# Altium PCB PCB.PcbDoc
Units mm, origin at the board's own origin, x right, y up, seen from the top; angles counter-clockwise.
Board outline 50 x 50 mm, 2 copper layers (Top Layer, Bottom Layer), stack 1.57 mm thick; 94 components, 44 nets, 247 pads, 64 vias.
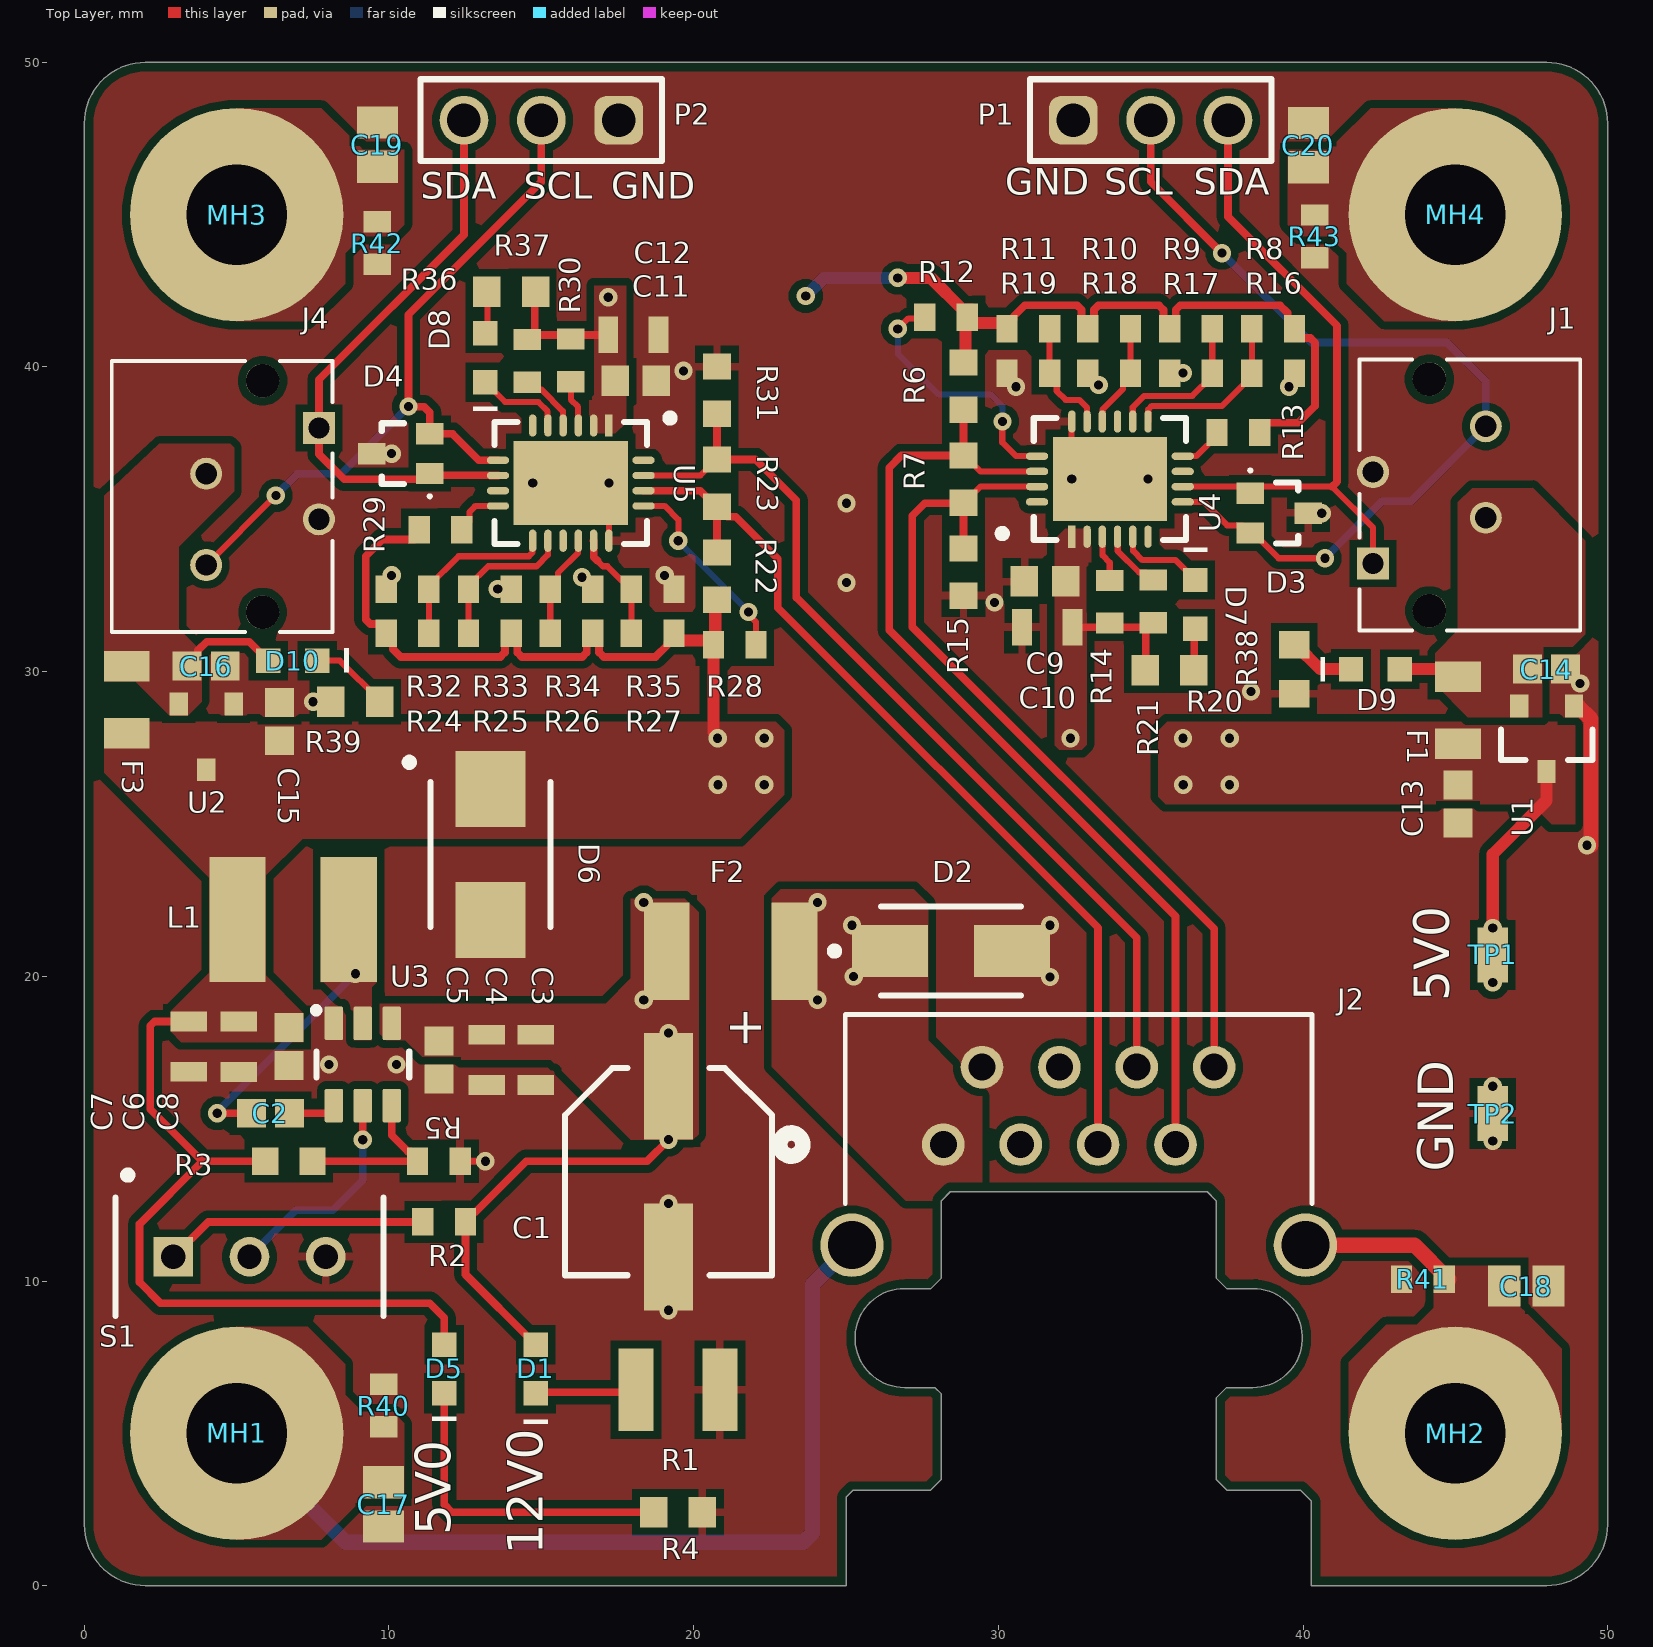
[diagram p0: Top Layer view]
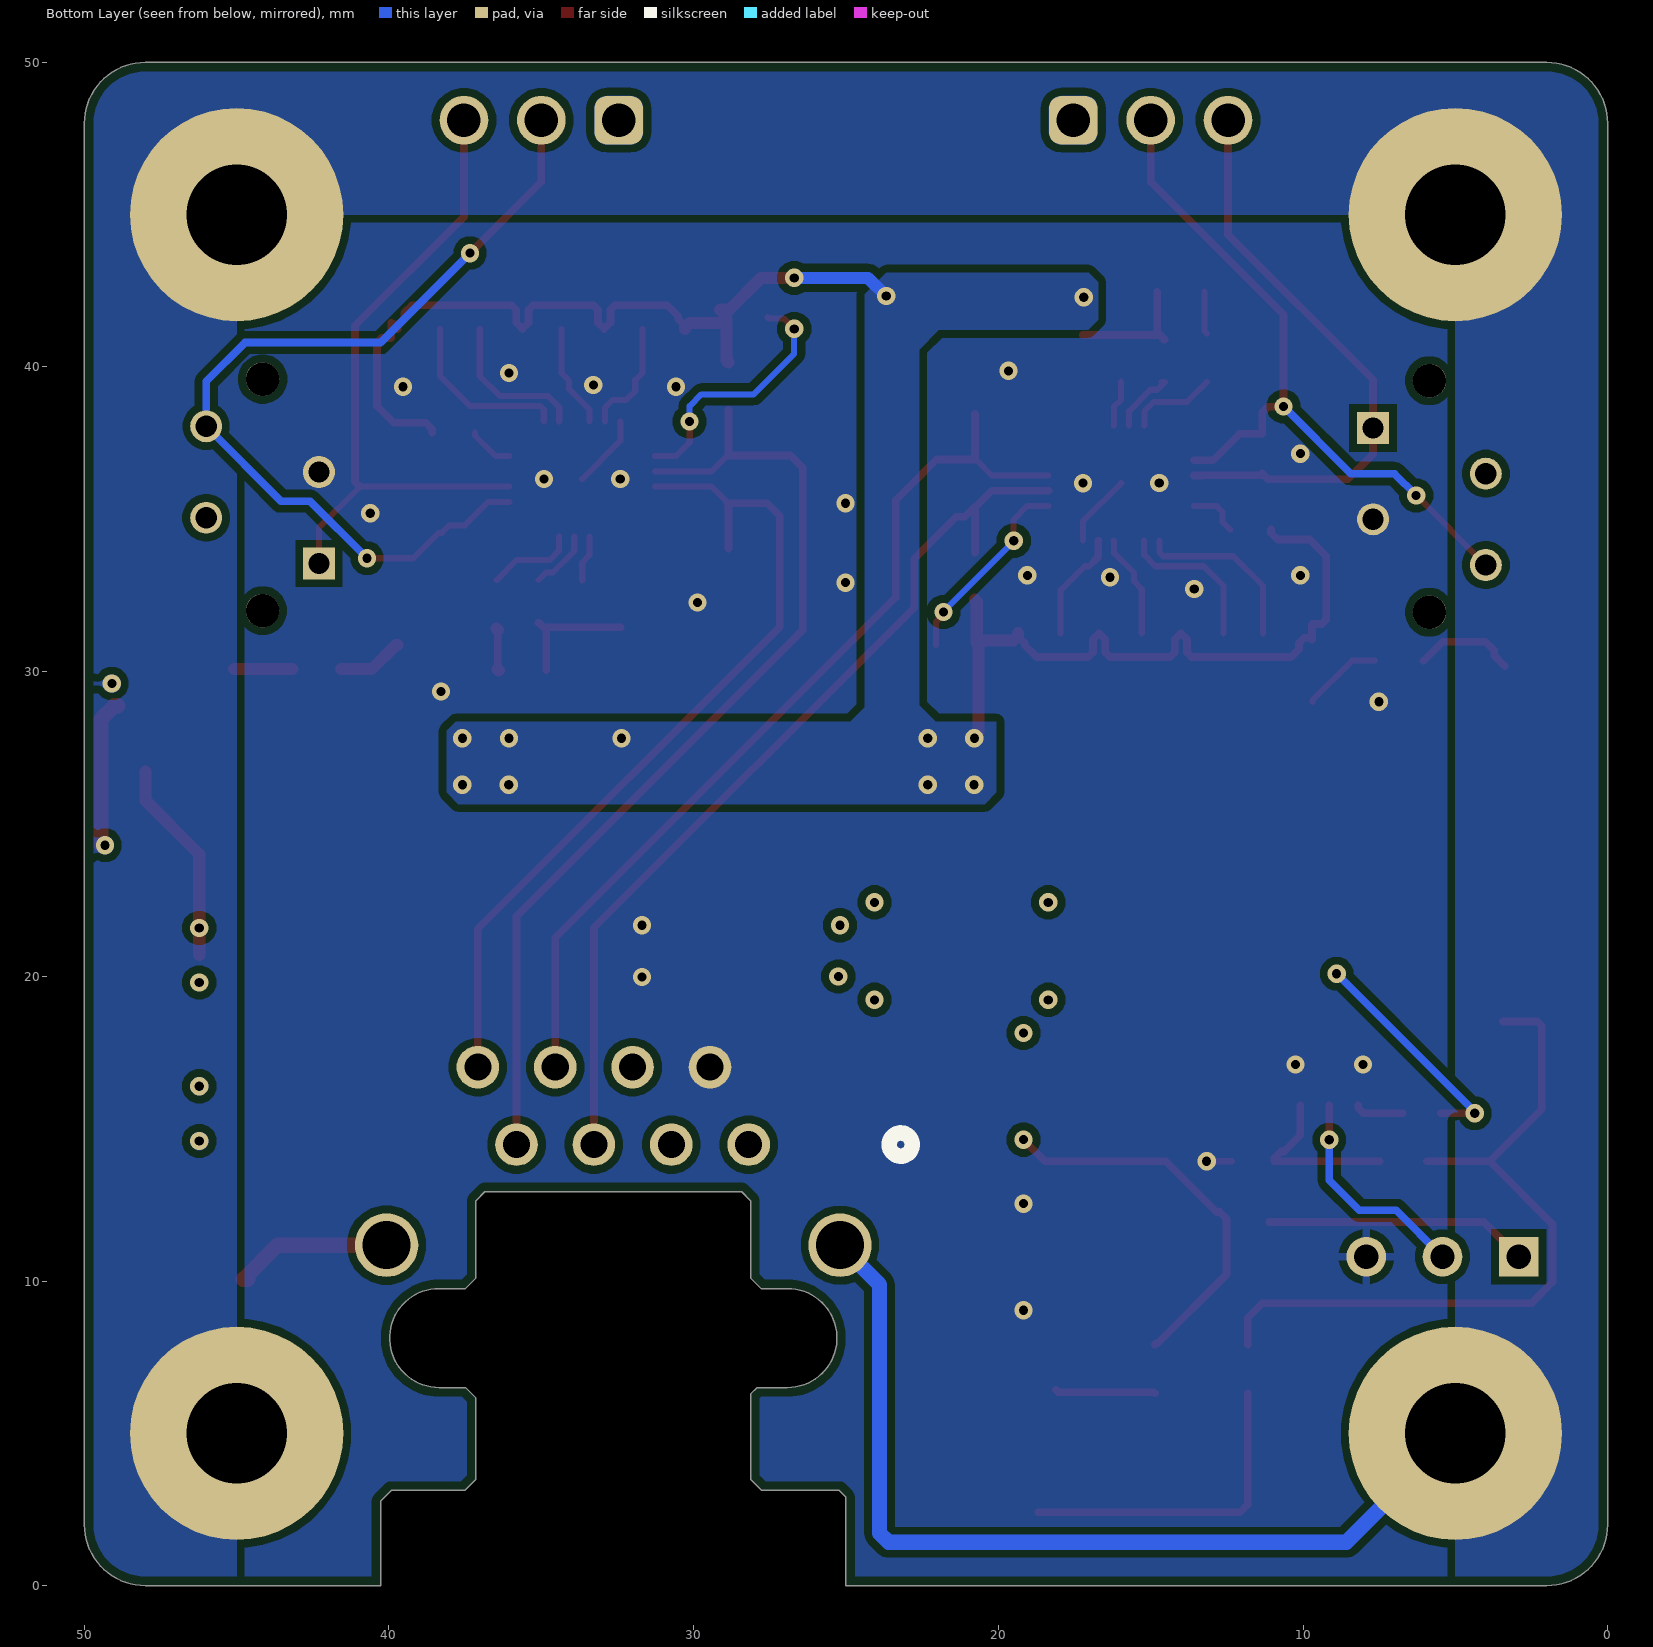
[diagram p1: Bottom Layer view, seen from below]
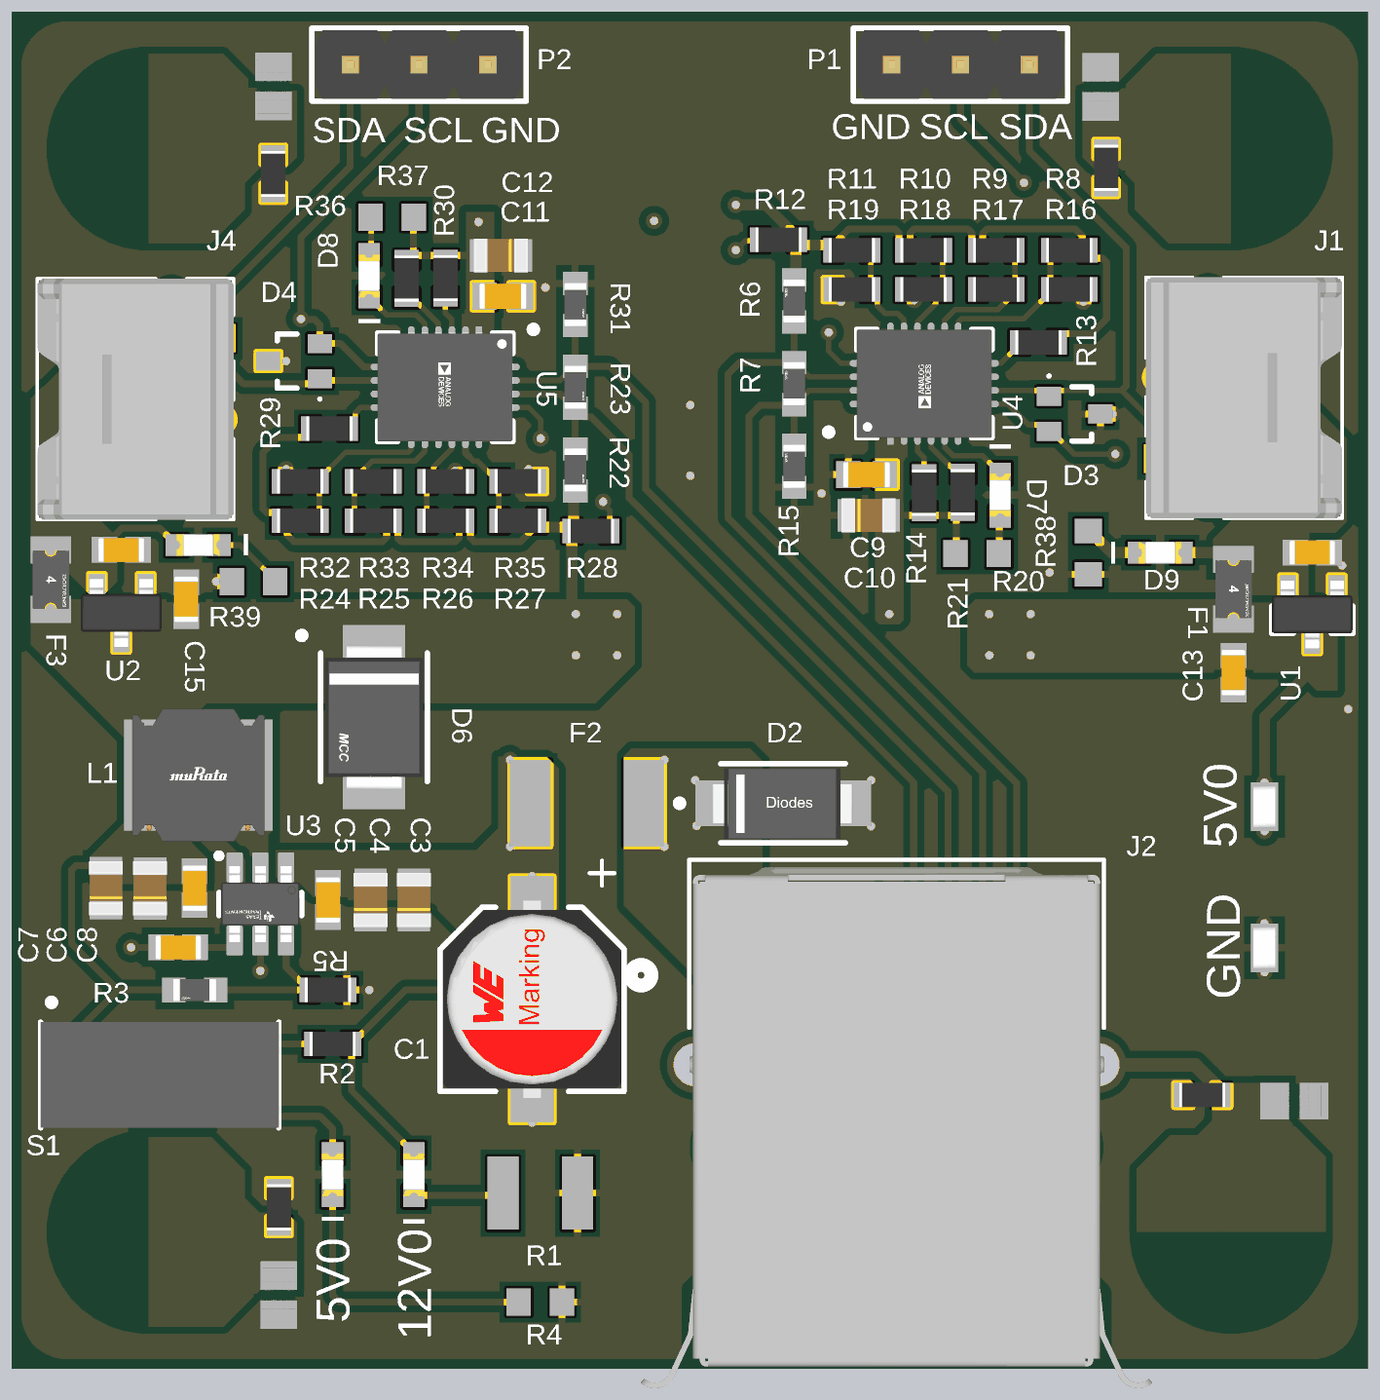
[diagram p2: 3D render of the assembled board from above, using the file's embedded part models]

## Layer stack, top to bottom
Top Solder: solder mask 0.01, Solder Resist, Dk 3.5
Top Layer: signal copper 0.035
Dielectric 1: dielectric 1.5, FR-4, Dk 4.8
Bottom Layer: signal copper 0.035
Bottom Solder: solder mask 0.01, Solder Resist, Dk 3.5

## Board outline
2,0 cw(c2,2) 0,2 0,48 cw(c2,48) 2,50 48,50 cw(c48,48) 50,48 50,2 cw(c48,2) 48,0 40.272,0 40.272,2.781 39.929,3.124 37.516,3.124 37.148,3.492 37.148,6.159 37.49,6.502 38.354,6.502 ccw(c38.354,8.128) 38.354,9.754 37.49,9.754 37.148,10.096 37.148,12.636 36.855,12.929 28.423,12.929 28.13,12.636 28.13,10.096 27.788,9.754 26.924,9.754 ccw(c26.924,8.128) 26.924,6.502 27.915,6.502 28.13,6.286 28.13,3.492 27.762,3.124 25.222,3.124 25.006,2.908 25.006,0

## Design rules (kind name [scope] priority, off if disabled: settings)
AcuteAngle [All] p1: minimum=6.00000000000000E+0001 checktracksonly=FALSE
AssemblyTestPointUsage [All] p1 off: valid=2
AssemblyTestpoint [All] p1 off: testpointundercomponent=TRUE minsize=1.016 maxsize=2.54 preferedsize=1.524 minholesize=0 maxholesize=1.016 preferedholesize=0.813 testpointgrid=0.025 usegrid=TRUE gridtolerance=0 allowsidetop=TRUE allowsidebottom=TRUE
BoardOutlineClearance [All] p1: gap=0.3 ignorepadtopadclearanceinfootprint=FALSE
Clearance [All] p1: gap=0.254 ignorepadtopadclearanceinfootprint=TRUE except(0: Arc-Hole Track-Hole SMDPad-Hole THPad-Hole Via-Hole Fill-Hole Poly-Hole Region-Hole Text-Hole; 0.127: Track-Track SMDPad-SMDPad; 0.2: Track-SMDPad; 0.33: Track-THPad)
FabricationTestPointUsage [All] p1: valid=2 allowmultiple=FALSE
HoleSize [All] p1: absolutevalues=TRUE maxlimit=10 minlimit=0.025 maxpercent=80.000 minpercent=20.000
MinimumSolderMaskSliver [All] p1: minsoldermaskwidth=0.1
NetAntennae [All] p1 off: netantennaetolerance=0
PolygonConnect Vias [IsVia] p1: connectstyle=Direct reliefconductorwidth=0.254 reliefentries=4 polygonreliefangle="90 Angle" airgapwidth=0.254
PolygonConnect Direct_PadClass [InPadClass('Direct')] p2: connectstyle=Direct reliefconductorwidth=0.254 reliefentries=4 polygonreliefangle="90 Angle" airgapwidth=0.254
PolygonConnect [All] p3: connectstyle=Relief reliefconductorwidth=0.254 reliefentries=4 polygonreliefangle="90 Angle" airgapwidth=0.254
RoutingVias [All] p1: holewidth=0.4 width=0.6 viastyle="Through Hole" minholewidth=0.3 minwidth=0.5 maxholewidth=6.3 maxwidth=10
SolderMaskExpansion [All] p1: expansion=0.102 istentingtop=FALSE
Width [All] p1: maxlimit=1 minlimit=0.127 preferedwidth=0.254
24 further rules are at their usual default settings.

## Classes and differential pairs
component class Main: C17 C18 C19 C20 MH1 MH2 MH3 MH4 R40 R41 R42 R43
pad class Direct: C1-1 C1-2 C2-1 C2-2 C3-1 C3-2 C4-1 C4-2 C5-1 C5-2 C6-1 C6-2 C7-1 C7-2 C8-1 C8-2 C9-2 C10-2 C11-1 C11-2 C12-1 C12-2 C13-1 C13-2 C14-1 C14-2 C15-1 C15-2 C16-1 C16-2 C17-1 C17-2 C18-1 C18-2 C19-1 C19-2 C20-1 C20-2 D2-1 D2-2 D4-1 D4-2 D4-3 D6-1 D6-2 F1-1 F1-2 F2-1 F2-2 F3-1 F3-2 J1-1 J1-2 J1-3 J2-1 J2-2 J2-3 J4-2 J4-3 L1-1 L1-2 MH1-1 MH2-1 MH3-1 MH4-1 P1-1 P2-1 R19-1 R19-2 R35-1 R35-2 R40-1 R40-2 R41-1 R41-2 R42-1 R42-2 R43-1 R43-2 U1-1 U1-2 U1-3 U2-1 U2-2 U2-3 U3-1 U3-2 U3-3 U3-4 U3-5 U3-6 U4-1 U4-2 U5-1 U5-2
component class Power: C2 C3 C4 C5 C6 C7 C8 D5 D6 L1 R2 R3 R4 R5 S1 U3
component class "I2C extender 1": C11 C12 D8 R22 R23 R24 R25 R26 R27 R28 R29 R30 R31 R32 R33 R34 R35 R36 R37 U5
component class "I2C extender 0": C9 C10 D7 R6 R7 R8 R9 R10 R11 R12 R13 R14 R15 R16 R17 R18 R19 R20 R21 U4
component class Connectors: C1 C13 C14 C15 C16 D1 D2 D3 D4 D9 D10 F1 F2 F3 J1 J2 J4 P1 P2 R1 R38 R39 TP1 TP2 U1 U2

## Components (designator, comment, footprint, x,y, rotation, side; value= is the part's Value field where it differs from the comment)
C1 "875105544003" WCAP-PSLP_D6.3H5.8 19.177,13.589 r90 top value=22µF
C2 "Capacitor 100 nF +/-10% 50 V 0603" CAPC1608X90X40NL10T20 6.108,15.507 r0 top value=100nF
C3 "CAP CER 10UF 16V X5R 0805" "CAP CER 10UF 16V X5R 0805-Footprint-1" 14.813,17.257 r90 top value=10µF
C4 "CAP CER 10UF 16V X5R 0805" "CAP CER 10UF 16V X5R 0805-Footprint-1" 13.21,17.257 r90 top value=10µF
C5 "Capacitor 100 nF +/-10% 50 V 0603" CAPC1608X90X40NL10T20 11.638,17.257 r90 top value=100nF
C6 "CL21A226MOQNNNE" CL21A226MOQNNNE-Footprint-1 5.066,17.687 r90 top value=22µF
C7 "CL21A226MOQNNNE" CL21A226MOQNNNE-Footprint-1 3.435,17.695 r90 top value=22µF
C8 "Capacitor 100 nF +/-10% 50 V 0603" CAPC1608X90X40NL10T20 6.713,17.694 r90 top value=100nF
C9 "Capacitor 1uF +/- 10% 16V 0603" CAPC1608X90X35NL15T15 31.531,32.961 r0 top value=1µF
C10 "CL21A475KOFNNNE" CL21A475KOFNNNE-Footprint-1 31.605,31.456 r0 top value=4.7µF
C11 "Capacitor 1uF +/- 10% 16V 0603" CAPC1608X90X35NL15T15 18.098,39.55 r180 top value=1µF
C12 "CL21A475KOFNNNE" CL21A475KOFNNNE-Footprint-1 18.024,41.055 r180 top value=4.7µF
C13 "Capacitor 100 nF +/-10% 50 V 0603" CAPC1608X90X40NL10T20 45.085,25.654 r90 top value=100nF
C14 "Capacitor 100 nF +/-10% 50 V 0603" CAPC1608X90X40NL10T20 47.996,30.083 r180 top value=100nF
C15 "Capacitor 100 nF +/-10% 50 V 0603" CAPC1608X90X40NL10T20 6.4,28.358 r270 top value=100nF
C16 "Capacitor 100 nF +/-10% 50 V 0603" CAPC1608X90X40NL10T20 4,30.183 r180 top value=100nF
C17 "CL21A225KBFNNNE" FP-CL21-IPC_C 9.821,2.667 r90 top value=2.2µF
C18 "CL21A225KBFNNNE" FP-CL21-IPC_C 47.332,9.834 r180 top value=2.2µF
C19 "CL21A225KBFNNNE" FP-CL21-IPC_C 9.621,47.3 r270 top value=2.2µF
C20 "CL21A225KBFNNNE" FP-CL21-IPC_C 40.179,47.281 r270 top value=2.2µF
D1 "150060RS75000" WL-SMCW_0603_150060xx75000 14.812,7.112 r90 top
D2 "SMAJ5.0A-13-F" FP-SMA-MFG 28.448,20.828 r0 top
D3 "DF3A6.8FUT1G" ONSC-SC-70-3-419-04_V 39.219,35.204 r0 top
D4 "DF3A6.8FUT1G" ONSC-SC-70-3-419-04_V 10.388,37.155 r180 top
D5 "150060BS75000" WL-SMCW_0603_150060xx75000 11.811,7.112 r90 top
D6 "SMBJ5340B-TP" FP-DO-214AA-MFG 13.335,24.003 r270 top
D7 "150060YS75000" WL-SMCW_0603_150060xx75000 36.469,32.207 r270 top
D8 "150060YS75000" WL-SMCW_0603_150060xx75000 13.16,40.304 r90 top
D9 "150060BS75000" WL-SMCW_0603_150060xx75000 42.374,30.083 r0 top
D10 "150060BS75000" WL-SMCW_0603_150060xx75000 6.842,30.36 r180 top
F1 "MF-PSMF050X-2" FP-MF-PSMF-MFG 45.085,28.729 r270 top
F2 "MF-MSMF075-2" BOUR-MF-MSMF050-2_V 21.212,20.828 r180 top
F3 "MF-PSMF050X-2" FP-MF-PSMF-MFG 1.397,29.083 r270 top
J1 "5031750400" 5031750400-Footprint-1 42.3,33.552 r90 top
J2 "RJULE4218201" RJULE4218201-Footprint-1 28.194,14.478 r0 top locked
J4 "5031750400" 5031750400-Footprint-1 7.7,38 r270 top
L1 "LQH5BPN4R7N38L" FP-LQH5BPN_38-MFG 6.853,21.863 r0 top
MH1 "PTH-M3D7X7" PTH-M2D5X5#1 100.457,5.334 r0 top
MH2 "PTH-M3D7X7" PTH-M2D5X5#2 108.839,5.334 r0 top
MH3 "PTH-M3D7X7" PTH-M2D5X5#3 117.348,5.334 r0 top
MH4 "PTH-M3D7X7" PTH-M2D5X5#4 125.857,5.334 r0 top
P1 "61300311121" 61300311121 35,48.1 r0 top
P2 "61300311121" 61300311121 15,48.1 r180 top
R1 "RC1210JR-07510RL" RESC3126X60X50NL10T20 19.484,6.431 r180 top value=510
R2 "Resistor 10k +/-1% 0603 100 mW" RESC1608X55X25NL10T15 11.811,11.938 r0 top value=10k
R3 "RC0603FR-0756K2L" RC0603JR-0730KL-Footprint-1 6.713,13.931 r180 top value=56.2k
R4 "RC0603JR-07180RL" RESC0603(1608)_N 19.484,2.413 r180 top value=180
R5 "Resistor 10k +/-1% 0603 100 mW" RESC1608X55X25NL10T15 11.638,13.931 r180 top value=10k
R6 "RC0603FR-07620RL" RC0603JR-0720KL-Footprint-1 28.859,39.374 r90 top value=620
R7 "RC0603FR-07110RL" RC0603JR-0720KL-Footprint-1 28.859,36.322 r90 top value=110
R8 "Resistor 10k +/-1% 0603 100 mW" RESC1608X55X25NL10T15 39.019,41.251 r0 top value=10k
R9 "Resistor 10k +/-1% 0603 100 mW" RESC1608X55X25NL10T15 36.322,41.251 r180 top value=10k
R10 "Resistor 10k +/-1% 0603 100 mW" RESC1608X55X25NL10T15 33.637,41.251 r180 top value=10k
R11 "Resistor 10k +/-1% 0603 100 mW" RESC1608X55X25NL10T15 30.985,41.251 r180 top value=10k
R12 "Resistor 10k +/-1% 0603 100 mW" RESC1608X55X25NL10T15 28.28,41.632 r180 top value=10k
R13 "Resistor 10k +/-1% 0603 100 mW" RESC1608X55X25NL10T15 37.876,37.849 r180 top value=10k
R14 "Resistor 10k +/-1% 0603 100 mW" RESC1608X55X25NL10T15 33.657,32.295 r90 top value=10k
R15 "RC0603FR-07620RL" RC0603JR-0720KL-Footprint-1 28.859,33.27 r90 top value=620
R16 "Resistor 10k +/-1% 0603 100 mW" RESC1608X55X25NL10T15 39.019,39.8 r180 top value=10k
R17 "Resistor 10k +/-1% 0603 100 mW" RESC1608X55X25NL10T15 36.322,39.8 r0 top value=10k
R18 "Resistor 10k +/-1% 0603 100 mW" RESC1608X55X25NL10T15 33.637,39.8 r0 top value=10k
R19 "Resistor 10k +/-1% 0603 100 mW" RESC1608X55X25NL10T15 30.985,39.8 r0 top value=10k
R20 "RC0603JR-07180RL" RESC0603(1608)_N 35.619,30.042 r180 top value=180
R21 "Resistor 10k +/-1% 0603 100 mW" RESC1608X55X25NL10T15 35.09,32.308 r90 top value=10k
R22 "RC0603FR-07620RL" RC0603JR-0720KL-Footprint-1 20.77,33.137 r270 top value=620
R23 "RC0603FR-07110RL" RC0603JR-0720KL-Footprint-1 20.77,36.189 r270 top value=110
R24 "Resistor 10k +/-1% 0603 100 mW" RESC1608X55X25NL10T15 10.61,31.26 r180 top value=10k
R25 "Resistor 10k +/-1% 0603 100 mW" RESC1608X55X25NL10T15 13.308,31.26 r0 top value=10k
R26 "Resistor 10k +/-1% 0603 100 mW" RESC1608X55X25NL10T15 15.993,31.26 r0 top value=10k
R27 "Resistor 10k +/-1% 0603 100 mW" RESC1608X55X25NL10T15 18.655,31.26 r0 top value=10k
R28 "Resistor 10k +/-1% 0603 100 mW" RESC1608X55X25NL10T15 21.349,30.879 r0 top value=10k
R29 "Resistor 10k +/-1% 0603 100 mW" RESC1608X55X25NL10T15 11.688,34.662 r0 top value=10k
R30 "Resistor 10k +/-1% 0603 100 mW" RESC1608X55X25NL10T15 15.972,40.217 r270 top value=10k
R31 "RC0603FR-07620RL" RC0603JR-0720KL-Footprint-1 20.77,39.241 r270 top value=620
R32 "Resistor 10k +/-1% 0603 100 mW" RESC1608X55X25NL10T15 10.61,32.711 r0 top value=10k
R33 "Resistor 10k +/-1% 0603 100 mW" RESC1608X55X25NL10T15 13.308,32.711 r180 top value=10k
R34 "Resistor 10k +/-1% 0603 100 mW" RESC1608X55X25NL10T15 15.993,32.711 r180 top value=10k
R35 "Resistor 10k +/-1% 0603 100 mW" RESC1608X55X25NL10T15 18.655,32.711 r180 top value=10k
R36 "RC0603JR-07180RL" RESC0603(1608)_N 14.01,42.469 r0 top value=180
R37 "Resistor 10k +/-1% 0603 100 mW" RESC1608X55X25NL10T15 14.539,40.203 r270 top value=10k
R38 "RC0603JR-07180RL" RESC0603(1608)_N 39.719,30.079 r90 top value=180
R39 "RC0603JR-07180RL" RESC0603(1608)_N 8.89,29.008 r0 top value=180
R40 "RC0603FR-07100KL" RESC1608X55X25NL10T15 9.821,5.912 r270 top value=100k
R41 "RC0603FR-07100KL" RESC1608X55X25NL10T15 43.932,10.054 r0 top value=100k
R42 "RC0603FR-07100KL" RESC1608X55X25NL10T15 9.621,44.069 r90 top value=100k
R43 "RC0603FR-07100KL" RESC1608X55X25NL10T15 40.379,44.288 r90 top value=100k
S1 "SLW-883935-2A-D" SLW-883935-2A-D-Footprint-1 5.421,10.795 r0 top
TP1 "RCUCTE" FP-S2761-46R-MFG 46.228,20.701 r90 top
TP2 "RCUCTE" FP-S2761-46R-MFG 46.228,15.494 r90 top
U1 "AP2337SA-7" SOT90P240X120-3L 47.996,27.803 r270 top
U2 "AP2337SA-7" SOT90P240X120-3L 4,27.858 r270 top
U3 "TPS563200DDCR" FP-DDC0006A-MFG 9.139,17.107 r270 top
U4 "LTC4331IUFD#TRPBF" FP-UFD-20-05-08-1711-IPC_C 33.663,36.322 r90 top
U5 "LTC4331IUFD#TRPBF" FP-UFD-20-05-08-1711-IPC_C 15.966,36.189 r270 top

## Footprints (in the part's own frame and the unit in brackets; to place one, negate y for a bottom-side part, rotate by r counter-clockwise, add the part's x,y. Pads: shape width x height; smd on the part's side, far side on the other; paste and mask are expansions set on the pad)
5031750400-Footprint-1 [mm]
  rect 1.05x1.05 / inner round 1.524 / far side rect 1.05x1.05 hole 0.7 paste-2539.97 mask+0.076: 1(0,0)
  round 1.05 / inner round 1.524 / far side round 1.05 hole 0.7 paste-2539.97 mask+0.076: 2(1.5,-3.7) 3(3,0) 4(4.5,-3.7)
  round 1.1 / inner round 1.524 / far side round 1.1 hole 1.1 unplated paste-2539.97 mask+0.076: 5(-1.55,-1.85) 6(6.05,-1.85)
  silkscreen extent -2.2,-6.8 6.7,0.45, body extent -2.2,-6.8 6.7,0.45, height 6.96
61300311121 [mm] "Pin Header, pitch 2.54 mm, THT, Vertical, single row, 3p"
  rrect50% 1.6x1.6 hole 1.1: 1(-2.54,0)
  round 1.6 hole 1.1: 2(0,0) 3(2.54,0)
  silkscreen extent -3.96,-1.35 3.96,1.35, body extent -3.81,-1.27 3.81,1.27, height 8.57
BOUR-MF-MSMF050-2_V [mm] "SMD, 2-Leads, Body 4.55x3.24mm"
  rect 1.5x3.2 smd: 1(-2.1,0) 2(2.1,0)
  body extent -2.28,-1.62 2.28,1.62, height 0.85
"CAP CER 10UF 16V X5R 0805-Footprint-1" [mm]
  rect 0.652x1.199 smd paste+0 mask+0: 1(-0.826,0) 2(0.826,0)
  body extent -1,-0.63 1,0.63, height 1.35
CAPC1608X90X35NL15T15 [mm] "Chip Capacitor, 2-Leads, Body 1.75x0.95mm, IPC Medium Density"
  rect 0.9x1 smd: 1(-0.675,0) 2(0.675,0)
  body extent -0.87,-0.48 0.87,0.48, height 0.9
CAPC1608X90X40NL10T20 [mm] "Chip Capacitor, 2-Leads, Body 1.70x0.90mm, IPC Medium Density"
  rect 0.95x0.95 smd mask+0: 1(-0.625,0) 2(0.625,0)
  body extent -0.85,-0.45 0.85,0.45, height 0.9
CL21A226MOQNNNE-Footprint-1 [mm] "CL21A226MOQNNNE-Footprint"
  rect 0.652x1.199 smd paste+0 mask+0: 1(-0.826,0) 2(0.826,0)
  body extent -1,-0.63 1,0.63, height 1.35
CL21A475KOFNNNE-Footprint-1 [mm] "CL21A475KOFNNNE-Footprint"
  rect 0.652x1.199 smd paste+0 mask+0: 1(-0.826,0) 2(0.826,0)
  body extent -1,-0.63 1,0.63, height 1.35
FP-CL21-IPC_C [mm]
  rect 1.055x1.356 smd paste+0 mask+0: 1(-0.726,0) 2(0.726,0)
  body extent -1,-0.63 1,0.63, height 1.45
FP-DDC0006A-MFG [mm]
  rrect17% 1.1x0.6 smd paste+0 mask+0: 1(-1.35,-0.95) 2(-1.35,0) 3(-1.35,0.95) 4(1.35,0.95) 5(1.35,0) 6(1.35,-0.95)
  silkscreen extent -1.88,-1.63 0.42,1.53, body extent -1.4,-1.45 1.4,1.45, height 1.1
FP-DO-214AA-MFG [mm]
  rect 2.5x2.3 smd paste+0 mask+0: 1(-2.15,0) 2(2.15,0)
  silkscreen extent -3.15,-2.79 2.37,1.97, body extent -2.66,-1.8 2.67,1.82, height 2.41
FP-LQH5BPN_38-MFG [mm]
  rect 1.85x4.1 smd paste+0 mask+0: 1(-1.825,0) 2(1.825,0)
  body extent -2.45,-2.45 2.45,2.45, height 4
FP-MF-PSMF-MFG [mm]
  rect 1x1.5 smd paste+0 mask+0: 1(-1.1,0) 2(1.1,0)
  body extent -1.07,-0.67 1.07,0.67, height 0.85
FP-S2761-46R-MFG [mm]
  rect 1.8x1 smd paste+0 mask+0: 1(0,0)
  body extent -0.8,-0.4 0.8,0.4, height 1.28
FP-SMA-MFG [mm]
  rect 2.5x1.7 smd paste+0 mask+0: 1(-2,0) 2(2,0)
  silkscreen extent -3.95,-1.46 2.3,1.46, body extent -2.63,-1.32 2.57,1.29, height 2.4
FP-UFD-20-05-08-1711-IPC_C [mm]
  rect 0.731x0.242 smd paste+0 mask+0: 1(-1.891,1.25)
  rrect100% 0.731x0.242 smd paste+0 mask+0: 2(-1.891,0.75) 3(-1.891,0.25) 4(-1.891,-0.25) 5(-1.891,-0.75) 6(-1.891,-1.25) 11(1.891,-1.25) 12(1.891,-0.75) 13(1.891,-0.25) 14(1.891,0.25) 15(1.891,0.75) 16(1.891,1.25)
  rrect100% 0.242x0.731 smd paste+0 mask+0: 7(-0.75,-2.391) 8(-0.25,-2.391) 9(0.25,-2.391) 10(0.75,-2.391) 17(0.75,2.391) 18(0.25,2.391) 19(-0.25,2.391) 20(-0.75,2.391)
  rect 2.75x3.75 smd paste-1000 mask+0: 21(0,0)
  silkscreen extent -2,-2.5 2,3.66, body extent -2,-2.5 2,2.5, height 0.8
ONSC-SC-70-3-419-04_V [mm] "SOT23, 3-Leads, Body 2x1.25mm, Pitch 0.65mm"
  rect 0.9x0.7 smd: 1(-0.95,0.65) 2(-0.95,-0.65) 3(0.95,0)
  silkscreen extent -1,-1 0.63,1.45, body extent -0.63,-1 0.63,1, height 1
PTH-M2D5X5#1 [mm]
  round 7 hole 3.3: 1(-95.457,-0.334)
PTH-M2D5X5#2 [mm]
  round 7 hole 3.3: 1(-63.839,-0.334)
PTH-M2D5X5#3 [mm]
  round 7 hole 3.3: 1(-112.348,39.666)
PTH-M2D5X5#4 [mm]
  round 7 hole 3.3: 1(-80.857,39.666)
RC0603JR-0720KL-Footprint-1 [mm] "RC0603JR-0720KL-Footprint"
  rect 0.859x0.912 smd paste+0 mask+0: 1(-0.777,0) 2(0.777,0)
  body extent -0.8,-0.4 0.8,0.4, height 0.55
RC0603JR-0730KL-Footprint-1 [mm]
  rect 0.859x0.912 smd paste+0 mask+0: 1(-0.777,0) 2(0.777,0)
  body extent -0.8,-0.4 0.8,0.4, height 0.55
RESC0603(1608)_N [mm] "Chip Resistor, Body 1.6x0.8mm, IPC Medium Density"
  rect 0.9x1 smd: 1(-0.8,0) 2(0.8,0)
  body extent -0.85,-0.47 0.85,0.47, height 0.6
RESC1608X55X25NL10T15 [mm] "Chip Resistor, 2-Leads, Body 1.70x0.90mm, IPC Medium Density"
  rect 0.7x0.9 smd: 1(-0.7,0) 2(0.7,0)
  body extent -0.85,-0.45 0.85,0.45, height 0.55
RESC3126X60X50NL10T20 [mm] "Chip Resistor, 2-Leads, Body 3.10x2.60mm, IPC Medium Density"
  rect 1.15x2.7 smd: 1(-1.375,0) 2(1.375,0)
  body extent -1.6,-1.35 1.6,1.35, height 0.6
RJULE4218201-Footprint-1 [mil]
  round 55 / inner round 60 / far side round 55 hole 35 paste-99999 mask+0: 1(0,0) 2(50,100) 3(100,0) 4(150,100) 5(200,0) 6(250,100) 7(300,0) 8(350,100)
  round 82 / inner round 60 / far side round 82 hole 62 paste-99999 mask-41: 9(-118,-130) 10(468,-130)
  silkscreen extent -211,-77 476,168, body extent -197,-600 547,157, height 366
SLW-883935-2A-D-Footprint-1 [mm]
  rect 1.3x1.3 hole 0.8: 1(-2.5,0)
  round 1.3 hole 0.8: 2(0,0) 3(2.5,0)
  silkscreen extent -4.4,-1.95 4.4,2.78, body extent -4.4,-1.95 4.4,1.95, height 6.2
SOT90P240X120-3L [mm] "SOT23, 3-Leads, Body 2.90x2.40mm, Pitch 0.90mm, IPC High Density"
  rect 0.75x0.6 smd: 1(-1.075,0.9) 2(-1.075,-0.9) 3(1.075,0)
  silkscreen extent -0.3,-1.5 0.7,1.5, body extent -1.25,-1.5 1.25,1.5, height 1.2
WCAP-PSLP_D6.3H5.8 [mm] "Aluminum Polymer Capacitors, body diameter 6.3mm"
  rect 3.5x1.6 smd: 1(2.8,0) 2(-2.8,0)
  silkscreen extent -3.4,-3.4 3.4,3.4, body extent -3.65,-3.3 3.65,3.3, height 5.8
WL-SMCW_0603_150060xx75000 [mm] "SMD Mono-color Chip LED, body 1.6x0.8mm"
  rect 0.8x0.8 smd: 1(-0.8,0) 2(0.8,0)
  silkscreen extent -1.8,-0.4 -1.65,0.4, body extent -0.8,-0.4 0.8,0.4, height 0.7

## Part data
C1: library part CMP-001-00085-2, "22 µF 25 V Aluminum - Polymer Capacitors Radial, Can - SMD 30mOhm 2000 Hrs @ 105°C", Capacitor Type=Aluminium, Tolerance=20%, Voltage Rating=25V, Pins=2, RoHS Compliant=Yes
C2 C5 C8 C13 C14 C15 C16: library part CMP-001-00017-8, "Chip Capacitor, 100 nF, +/- 10%, 50 V, 0603 (1608 Metric)", Capacitor Type=Ceramic, Case/Package=0603, Max Operating Temperature=125°C, Min Operating Temperature=-55°C, Tolerance=10%, Voltage Rating=50V, Mounting Technology=SM, Pins=2, RoHS Compliant=True
C3 C4: library part CMP-001-00084-6, "Ceramic Capacitor, Multilayer, Ceramic, 16V, 10% +Tol, 10% -Tol, X5R, 15% TC, 10uF, Surface Mount, 0805", Capacitor Type=Ceramic, Case/Package=0805, Max Operating Temperature=85°C, Min Operating Temperature=-55°C, Voltage Rating=16V, Mounting Technology="Surface Mount", Pins=2, RoHS Compliant=Yes
C6 C7: library part CMP-001-00087-3, "Ceramic Capacitor, Multilayer, Ceramic, 16V, 20% +Tol, 20% -Tol, X5R, 15% TC, 22uF, Surface Mount, 0805", Capacitor Type=Ceramic, Case/Package=0805, Max Operating Temperature=85°C, Min Operating Temperature=-55°C, Voltage Rating=16V, Mounting Technology="Surface Mount", Pins=2, RoHS Compliant=Yes
C9 C11: library part CMP-001-00004-8, "Chip Capacitor, 1 uF, +/- 10%, 16 V, 0603 (1608 Metric)", Capacitor Type=Ceramic, Case/Package=0603, Max Operating Temperature=125°C, Min Operating Temperature=-55°C, Tolerance=10%, Voltage Rating=16V, Mounting Technology=SM, Pins=2, RoHS Compliant=True
C10 C12: library part CMP-001-00089-2, "Ceramic Capacitor, Multilayer, Ceramic, 16V, 10% +Tol, 10% -Tol, X5R, 15% TC, 4.7uF, Surface Mount, 0805", Capacitor Type=Ceramic, Case/Package=0805, Max Operating Temperature=85°C, Min Operating Temperature=-55°C, Package Shape=Rectangular, Package Style=SMTMeter, Rated DC Voltage (URdc)=16V, Temperature Characteristics Code=X5R, Tolerance  (fill in as +-)=10%, Dielectric Material=Ceramic, Height=1.35mm, JESD-609 Code=e3, Length=2mm, Mounting Technology="Surface Mount", Multilayer=Yes, Packaging="Tape and Reel", Pins=2, Reach SVHC Compliant=Yes, RoHS Compliant=Yes, Terminal Finish=Nickel, Termination=Wraparound, Tolerance (fill in as +-)=10%, Width=1.25mm
C17 C18 C19 C20: library part CMP-001-00099-1, "Ceramic Capacitor, Multilayer, Ceramic, 50V, 10% +Tol, 10% -Tol, X5R, 15% TC, 2.2uF, Surface Mount, 0805", Capacitor Type=Ceramic, Case/Package=0805, Max Operating Temperature=85°C, Min Operating Temperature=-55°C, Package Shape=Rectangular, Package Style=SMTMeter, Rated DC Voltage (URdc)=50V, Temperature Characteristics Code=X5R, Tolerance  (fill in as +-)=10%, Dielectric Material=Ceramic, Height=1.25mm, JESD-609 Code=e3, Length=2mm, Mounting Technology="Surface Mount", Multilayer=Yes, Packaging="Tape and Reel", Pins=2, Reach SVHC Compliant=Yes, RoHS Compliant=Yes, Terminal Finish=Nickel, Termination=Wraparound, Tolerance (fill in as +-)=10%, Width=1.25mm
D1: library part CMP-007-00036-1, "Single Color LED, Red, Water Clear, 1.1mm", Forward Current=30mA, Max Operating Temperature=85°C, Min Operating Temperature=-40°C, Mounting Technology="Surface Mount", Pins=2, RoHS Compliant=Yes
D2: library part CMP-004-00031-3, "Trans Voltage Suppressor Diode, 400W, 5V V(RWM), Unidirectional, 1 Element, Silicon", Max Operating Temperature=150°C, Min Operating Temperature=-55°C, Pins=2, RoHS Compliant=Yes
D3 D4: library part CMP-004-00039-1, "Trans Voltage Suppressor Diode, 150W, Unidirectional, 2 Element, Silicon", Max Breakdown Voltage=7.2V, Max Operating Temperature=150°C, Max Power Dissipation=200mW, Min Breakdown Voltage=6.4V, Min Operating Temperature=-55°C, Non-rep Peak Rev Power Dis-Max=150W, Package Body Material=Plastic, Package Shape=Rectangular, Package Style="SMALL OUTLINEMeter", Peak Reflow Temperature (Cel)=260°C, Reference Voltage-Nom=6.8V, Test Current=5mA, Time @ Peak Reflow Temperature-Max (s)=40s, Voltage Tol-Max=5.9%, Diode Element Material=SILICON, Diode Type="TRANS VOLTAGE SUPPRESSOR", Dynamic Impedance-Max=50R, JESD-30 Code=R-PDSO-G3, JESD-609 Code=e3, Moisture Sensitivity Level=1, Number of Elements=2, Pins=3, Polarity=Unidirectional, Qualification Status="Not Qualified", Reach SVHC Compliant=Yes, RoHS Compliant=Yes, Surface Mount=Yes, Technology=ZENER, Terminal Finish=Tin, Terminal Form="Gull Wing", Terminal Position=DUAL
D5 D9 D10: library part CMP-007-00037-2, "Single Color LED, Blue, Water Clear, 1.1mm", Color=Blue, Forward Current=30mA, Max Operating Temperature=85°C, Min Operating Temperature=-40°C, Channels=1, Colour=Blue, Lens Style="WATER CLEAR", Luminous Intensity-Nom=145mcd, Mounting Technology="Surface Mount", Nominal Vf=3.2V, Optoelectronic Device Type="SINGLE COLOR LED", Overall Height=0.7mm, Packaging="Tape and Reel", Pins=2, Reach SVHC Compliant=Yes, RoHS Compliant=Yes, Shape=Rectangular, Size=1.1mm, Terminal Pitch=1.6mm, Viewing Angle=140°
D6: library part CMP-004-00036-2, "Zener Diode, 6V V(Z), 5%, 5W, Silicon, Unidirectional, DO-214AA", Max Operating Temperature=150°C, Max Power Dissipation=5W, Min Operating Temperature=-55°C, Package Body Material=Plastic, Package Shape=Rectangular, Package Style="SMALL OUTLINEMeter", Peak Reflow Temperature (Cel)=260°C, Reference Voltage-Nom=6V, Test Current=200mA, Time @ Peak Reflow Temperature-Max (s)=10s, Voltage Tol-Max=5%, Diode Element Material=SILICON, Diode Type=ZENER, Dynamic Impedance-Max=1R, JEDEC-95 Code=DO-214AA, JESD-30 Code=R-PDSO-C2, JESD-609 Code=e3, Moisture Sensitivity Level=1, Number of Elements=1, Pins=2, Polarity=Unidirectional, Qualification Status="Not Qualified", Reach SVHC Compliant=No, RoHS Compliant=Yes, Surface Mount=Yes, Technology=ZENER, Terminal Finish=Tin, Terminal Form="C BEND", Terminal Position=DUAL
D7 D8: library part CMP-007-00046-1, "Single Color LED, Yellow, Water Clear, 1.1mm", Color=Yellow, Forward Current=30mA, Forward Voltage=2V, Max Operating Temperature=85°C, Min Operating Temperature=-40°C, Channels=1, Lens Style="WATER CLEAR", Luminous Intensity-Nom=120mcd, Mounting Technology="Surface Mount", Optoelectronic Device Type="SINGLE COLOR LED", Overall Height=0.7mm, Packaging="Tape and Reel", Pins=2, Reach SVHC Compliant=Yes, RoHS Compliant=Yes, Shape=Rectangular, Size=1.1mm, Terminal Pitch=1.6mm, Viewing Angle=140°
F1 F3: library part CMP-005-00014-1, "PTC Resettable Fuse, 6V, Surface Mount", Max Operating Temperature=85°C, Min Operating Temperature=-40°C, Package Shape=Rectangular, Power=500mW, Rated AC Voltage (URac)=6V, Resistor Type="PTC RESETTABLE FUSE", JESD-609 Code=e4, Mounting Technology="Surface Mount", Packaging="Tape and Reel", Pins=2, Reach SVHC Compliant=Yes, RoHS Compliant=Yes, Terminal Finish=Nickel, Terminal Placement="Dual Ended", Termination=Wraparound, Thermistor Application="OVERLOAD PROTECTION"
F2: library part CMP-005-00013-2, "PTC Resettable Fuse, 13.2V, Surface Mount", Max Operating Temperature=85°C, Min Operating Temperature=-40°C, Package Height=0.85mm, Package Length=4.73mm, Package Shape=Rectangular, Package Style=SMTMeter, Package Width=3.41mm, Power=800mW, Rated AC Voltage (URac)=13.2V, Resistor Type="PTC RESETTABLE FUSE", JESD-609 Code=e4, Mounting Technology="Surface Mount", Packaging="Tape and Reel", Pins=2, Rated Temperature=85°C, Reach SVHC Compliant=Yes, Reference Standard=AEC-Q200, RoHS Compliant=Yes, Terminal Finish=Nickel, Terminal Placement="Dual Ended", Termination=Wraparound, Thermistor Application="OVERLOAD PROTECTION"
J1 J4: library part CMP-002-00074-2, "DIP Connector, 4 Contact(s), 2 Row(s), Female, Right Angle, 0.059 inch Pitch, Solder Terminal, Locking, Beige Insulator, Receptacle", Max Operating Temperature=85°C, Min Operating Temperature=-85°C, Connector Type=DIP, Mounting Technology=Board, RoHS Compliant=Yes
J2: library part CMP-002-00075-4, "Modular Jack - Right Angle, Input Output Connectors RJ45, 8P8C, Without LEDs, Shield."
L1: library part CMP-006-00023-1, "General Purpose Inductor, 4.7uH, 30%, 1 Element, Ferrite-Core, SMD, 1919", DC Resistance (DCR)=31.2mR, Inductance-Nom (L)=4.7uH, Inductor Application="RF INDUCTOR", Inductor Type="GENERAL PURPOSE INDUCTOR", Max Current Rating=3.8A, Max Operating Temperature=125°C, Min Operating Temperature=-40°C, Self Resonant Frequency=17MHz, Test Frequency=100kHz, Tolerance=30%, Channels=1, Core Material=Ferrite, Pins=2, Reach SVHC Compliant=Yes, RoHS Compliant=Yes, Shape/Size Description="RECTANGULAR PACKAGE", Shielding=Shielded, Surface Mount=Yes, Terminal Placement="Dual Ended", Termination="One Surface"
MH1 MH2 MH3 MH4: library part CMP-00028-00009-3, "M3 PTH (3.3mm), 7mm pad", Pins=1
P1 P2: library part CMP-002-00076-1, "Board Connector, 3 Contact(s), 1 Row(s), Male, Straight, 0.1 inch Pitch, Solder Terminal, Locking, Black Insulator, Plug", Max Operating Temperature=125°C, Min Operating Temperature=-40°C, Connector Type="BOARD CONNECTOR", Mounting Technology=Board, RoHS Compliant=Yes
R1: library part CMP-009-00179-1, "Fixed Resistor, Metal Glaze/thick Film, 0.5W, 510ohm, 200V, 5% +/-Tol, 100ppm/Cel, Surface Mount, 1210", Case/Package=1210, Max Operating Temperature=155°C, Min Operating Temperature=-55°C, Power=500mW, Tolerance=5%, Mounting Technology="Surface Mount", Pins=2, RoHS Compliant=Yes
R2 R5 R8 R9 R10 R11 R12 R13 R14 R16 R17 R18 R19 R21 R24 R25 R26 R27 R28 R29 R30 R32 R33 R34 R35 R37: library part CMP-009-00017-7, "Chip Resistor, 10 KOhm, +/- 1%, 01 W, -55 to 155 degC, 0603 (1608 Metric)", Case/Package=0603, Max Operating Temperature=155°C, Min Operating Temperature=-55°C, Power=100mW, Tolerance=1%, Voltage Rating=50V, Mounting Technology=SM, Pins=2, RoHS Compliant=True
R3: library part CMP-009-00192-1, "Fixed Resistor, Metal Glaze/thick Film, 0.1W, 56200ohm, 75V, 1% +/-Tol, 100ppm/Cel, Surface Mount, 0603", Case/Package=0603, Max Operating Temperature=155°C, Min Operating Temperature=-55°C, Package Height=0.45mm, Package Length=1.6mm, Package Shape=Rectangular, Package Style=SMTMeter, Package Width=0.8mm, Power=100mW, Rated Temperature=70°C, Resistor Type="FIXED RESISTOR", Temperature Coefficient=100ppm/°C, Tolerance=1%, Working Voltage=75V, Additional Feature="LASER TRIMMABLE", Construction=Chip, JESD-609 Code=e3, Mounting Technology="Surface Mount", Packaging="Tape and Reel", Pins=2, Reach SVHC Compliant=Yes, RoHS Compliant=Yes, Technology="METAL GLAZE/THICK FILM", Terminal Finish=Nickel, Termination=Wraparound
R4 R20 R36 R38 R39: library part CMP-009-00178-1, "Fixed Resistor, Metal Glaze/thick Film, 0.1W, 180ohm, 75V, 5% +/-Tol, 100ppm/Cel, Surface Mount, 0603", Case/Package=0603, Max Operating Temperature=155°C, Min Operating Temperature=-55°C, Power=100mW, Tolerance=5%, Mounting Technology="Surface Mount", Pins=2, RoHS Compliant=Yes
R6 R15 R22 R31: library part CMP-009-00191-1, "Fixed Resistor, Metal Glaze/thick Film, 0.1W, 620ohm, 75V, 1% +/-Tol, 100ppm/Cel, Surface Mount, 0603", Case/Package=0603, Max Operating Temperature=155°C, Min Operating Temperature=-55°C, Package Height=0.45mm, Package Length=1.6mm, Package Shape=Rectangular, Package Style=SMTMeter, Package Width=0.8mm, Power=100mW, Rated Temperature=70°C, Resistor Type="FIXED RESISTOR", Temperature Coefficient=100ppm/°C, Tolerance=1%, Working Voltage=75V, Additional Feature="LASER TRIMMABLE", Construction=Chip, JESD-609 Code=e3, Mounting Technology="Surface Mount", Packaging="Tape and Reel", Pins=2, Reach SVHC Compliant=Yes, RoHS Compliant=Yes, Technology="METAL GLAZE/THICK FILM", Terminal Finish=Nickel, Termination=Wraparound
R7 R23: library part CMP-009-00190-1, "Fixed Resistor, Metal Glaze/thick Film, 0.1W, 110ohm, 75V, 1% +/-Tol, 100ppm/Cel, Surface Mount, 0603", Case/Package=0603, Max Operating Temperature=155°C, Min Operating Temperature=-55°C, Package Height=0.45mm, Package Length=1.6mm, Package Shape=Rectangular, Package Style=SMTMeter, Package Width=0.8mm, Power=100mW, Rated Temperature=70°C, Resistor Type="FIXED RESISTOR", Temperature Coefficient=100ppm/°C, Tolerance=1%, Working Voltage=75V, Additional Feature="LASER TRIMMABLE", Construction=Chip, JESD-609 Code=e3, Mounting Technology="Surface Mount", Packaging="Tape and Reel", Pins=2, Reach SVHC Compliant=Yes, RoHS Compliant=Yes, Technology="METAL GLAZE/THICK FILM", Terminal Finish=Nickel, Termination=Wraparound
R40 R41 R42 R43: library part CMP-009-00195-1, "Fixed Resistor, Metal Glaze/thick Film, 0.1W, 100000ohm, 75V, 1% +/-Tol, 100ppm/Cel, Surface Mount, 0603", Case/Package=0603, Max Operating Temperature=155°C, Min Operating Temperature=-55°C, Package Height=0.45mm, Package Length=1.6mm, Package Shape=Rectangular, Package Style=SMTMeter, Package Width=0.8mm, Power=100mW, Rated Temperature=70°C, Resistor Type="FIXED RESISTOR", Temperature Coefficient=100ppm/°C, Tolerance=1%, Voltage Rating=50V, Working Voltage=75V, Additional Feature="LASER TRIMMABLE", Construction=Chip, JESD-609 Code=e3, Mounting Technology="Surface Mount", Packaging="Tape and Reel", Pins=2, Reach SVHC Compliant=Yes, RoHS Compliant=Yes, Technology="METAL GLAZE/THICK FILM", Terminal Finish=Nickel, Termination=Wraparound
S1: library part CMP-011-00017-1, "8.8 X 3.9 X 3.5 Mm, 2 Mm Raised"
TP1 TP2: library part CMP-002-00072-5, "Test point", Case/Package=0603, Max Operating Temperature=125°C, Min Operating Temperature=-55°C, Connector Type="Interconnection Device", Mounting Technology="Surface Mount", Pins=2, RoHS Compliant=Yes
U1 U2: library part CMP-015-00012-4, "Power Supply Support Circuit, Fixed, 1 Channel, PDSO3", Case/Package=SOP, Max Operating Temperature=85°C, Max Supply Voltage=5.5V, Min Operating Temperature=-40°C, Min Supply Voltage=2.7V, Nominal Supply Voltage=5V, Package Body Material=Plastic, Package Shape=Rectangular, Package Style="SMALL OUTLINEMeter", Peak Reflow Temperature (Cel)=260°C, Temperature Grade=INDUSTRIAL, Time @ Peak Reflow Temperature-Max (s)=40s, Adjustable Threshold=No, Channels=1, Height - Seated (Max)=1.2mm, JESD-30 Code=R-PDSO-G3, JESD-609 Code=e3, Length=2.9mm, Moisture Sensitivity Level=1, Number of Channels=1, Pins=3, Qualification Status="Not Qualified", Reach SVHC Compliant=Yes, RoHS Compliant=Yes, Surface Mount=Yes, Terminal Finish=Tin, Terminal Form="Gull Wing", Terminal Pitch=0.915mm, Terminal Position=DUAL, Throw Configuration="POWER SUPPLY SUPPORT CIRCUIT", Width=1.3mm
U3: library part CMP-019-00052-1, "Switching Regulator, 3A, 650kHz Switching Freq-Max, PDSO6", Case/Package=TSSOP, Frequency=650kHz, Max Operating Temperature=85°C, Max Output current=5.3A, Max Supply Voltage=17V, Min Input Voltage=4.5V, Min Operating Temperature=-40°C, Nominal Supply Voltage=12V, Package Body Material=Plastic, Package Shape=Rectangular, Package Style="SMALL OUTLINE, THIN PROFILE, SHRINK PITCHMeter", Peak Reflow Temperature (Cel)=260°C, Temperature Grade=INDUSTRIAL, Channels=1, Control Technique="PULSE WIDTH MODULATION", Height - Seated (Max)=1.1mm, JESD-30 Code=R-PDSO-G6, JESD-609 Code=e3, Length=2.9mm, Moisture Sensitivity Level=1, Pins=6, Reach SVHC Compliant=Yes, RoHS Compliant=Yes, Surface Mount=Yes, Switcher Configuration=BUCK, Terminal Finish=Tin, Terminal Form="Gull Wing", Terminal Pitch=0.95mm, Terminal Position=DUAL, Throw Configuration="SWITCHING REGULATOR", Width=1.6mm
U4 U5: library part CMP-015-00011-1, "Interface Circuit, CMOS, PQCC20", Reach SVHC Compliant=Yes, RoHS Compliant=Yes, Throw Configuration="POWER SUPPLY SUPPORT CIRCUIT"

## Via types
v1: diameter 0.6, hole 0.3, Top Layer to Bottom Layer, 64 vias

## Nets (pads, with @x,y where several pads share a name; then routed paths per layer and width w, separated by ;. In a path a pad name is that pad's centre, name@x,y a point inside that pad or via, vN(x,y) a via of type N, cw(c..) or ccw(c..) an arc to the next point about the centre after c; other vN are vias at no path point)
+5V06: C6.2 C7.2 C8.2 C9.2 C10.2 C11.2 C12.2 C13.2 C15.2 D5.2 D6.1 F1.2 F3.2 L1.1 R3.2 R6.2 R8.2 R9.2 R10.2 R11.2 R12.1 R13.1 R14.1 R20.2 R21.1 R22.2 R24.2 R25.2 R26.2 R27.2 R28.1 R29.1 R30.1 R36.2 R37.1 TP1.1 U1.3 U2.3 U4.1 U4.2 U5.1 U5.2 | length 92.2
  Top Layer w0.254: C7.2 2.314,18.521 2.165,18.372 2.165,15.64 3.874,13.931 ; R3.2 3.874,13.931 ; R29.1@11.053,34.662 11.053,34.562 10.83,34.339 9.784,34.339 9.233,33.788 9.233,31.712 9.382,31.563 9.687,31.563 9.707,31.542 9.707,31.058 9.76,31.11 9.96,31.11 10.133,30.937 10.133,30.737 10.387,30.483 13.656,30.483 13.805,30.632 13.805,31.058 R25.2 14.21,31.058 14.21,30.632 14.359,30.483 16.341,30.483 16.49,30.632 16.49,31.058 R26.2 16.896,31.057 16.896,30.633 17.046,30.483 18.744,30.483 19.132,30.872 19.132,30.937 19.246,31.051 R27.2@19.482,31.051 ; D5.2 11.811,8.794 11.334,9.271 2.499,9.271 1.814,9.956 1.814,11.871 3.874,13.931 ; R36.2@14.787,42.469 14.787,41.126 R37.1@14.714,41.053 ; C12.2@17.233,41.053 C12.2 R37.1@14.714,41.053 ; R11.2@30.285,41.44 30.374,41.44 30.508,41.574 30.508,41.663 30.873,42.028 32.583,42.028 32.733,41.878 32.733,41.454 R10.2 33.139,41.453 33.139,41.879 33.288,42.028 35.27,42.028 35.419,41.879 35.419,41.453 R9.2 35.824,41.453 35.824,41.879 35.973,42.028 39.242,42.028 39.496,41.774 39.496,41.574 39.669,41.401 R8.2@39.869,41.401 ; C10.2@32.396,31.458 R21.1@34.915,31.458 ; R20.2@34.842,30.042 34.842,31.385 R21.1@34.915,31.458 ; R13.1 38.576,37.949 38.799,38.172 39.845,38.172 40.396,38.723 40.396,40.799 40.248,40.948 39.942,40.948 39.922,40.969 39.922,41.453 R8.2@39.869,41.401 ; R8.2 R8.2@39.869,41.401 ; R37.1@14.714,41.053 14.564,40.903 R37.1 14.689,41.053 R37.1@14.714,41.053 ; R21.1@34.915,31.458 34.94,31.458 R21.1 35.065,31.608 R21.1@34.915,31.458
  Top Layer w0.4: R27.2 19.355,31.178 19.396,31.136 19.482,31.051 19.505,31.028 20.5,31.028 R28.1 20.649,28.004 20.786,27.867 v1(20.786,27.813) ; R28.1@20.709,30.94 20.709,32.3 R22.2 ; v1(26.7,42.925) 27.787,42.925 28.833,41.879 29.13,41.879 28.98,41.729 R12.1 ; R6.2 28.92,40.211 28.92,41.571 R12.1 ; R11.2 30.285,41.29 30.135,41.44 29.13,41.44 28.98,41.59 R12.1 ; TP1.1 v1(46.228,21.59) 46.228,24.007 47.996,25.775 U1.3
  Bottom Layer w0.4: v1(23.681,42.332) 24.274,42.925 v1(26.7,42.925)
  other v1: 46.228,19.801 20.794,26.289 22.318,26.289 36.068,26.289 37.592,26.289 22.318,27.813 32.368,27.813 36.06,27.813 37.592,27.813 17.198,42.291
+12V0: C1.1 C3.2 C4.2 C5.2 D1.2 F2.2 R2.2 U3.3 | length 12.9
  Top Layer w0.254: D1.2@14.859,7.912 14.812,7.959 14.765,7.959 12.511,10.213 R2.2 12.511,12.038 12.734,12.261 12.834,12.261 14.504,13.931 18.469,13.931 v1(19.177,14.639)
  other v1: 19.177,18.139 18.362,19.228 18.362,22.428
A1_0: R8.1 R16.2 U4.11 | length 5.8
  Top Layer w0.2: U4.11 34.921,38.221 34.921,38.606 35.038,38.723 37.342,38.723 38.319,39.7 R16.2 R8.1
A1_1: R24.1 R32.2 U5.11 | length 5.8
  Top Layer w0.2: R24.1 R32.2 11.31,32.811 12.287,33.788 14.591,33.788 14.708,33.906 14.708,34.29 U5.11
A2_0: R9.1 R17.2 U4.12 | length 5
  Top Layer w0.2: U4.12 34.413,38.678 34.785,39.05 36.372,39.05 37.022,39.7 R17.2 R9.1
A2_1: R25.1 R33.2 U5.12 | length 5
  Top Layer w0.2: R25.1 R33.2 12.608,32.811 13.258,33.461 14.845,33.461 15.216,33.833 U5.12
CHASSIS: C17.2 C18.2 C19.2 C20.2 J2.9 J2.10 MH1.1 MH2.1 MH3.1 MH4.1 R40.2 R41.2 R42.2 R43.2 | length 35.8
  Top Layer w0.5: J2.10 43.661,11.176 44.782,10.054 R41.2
  Bottom Layer w0.5: MH1.1 8.573,1.427 23.609,1.427 23.901,1.72 23.901,9.881 J2.9 J2.9@25.225,11.176
GND: C1.2 C3.1 C4.1 C5.1 C6.1 C7.1 C8.1 C9.1 C10.1 C11.1 C12.1 C13.1 C14.1 C15.1 C16.1 C17.1 C18.1 C19.1 C20.1 D2.2 D3.3 D4.3 D6.2 J1.3 J2.2 J4.3 P1.1 P2.1 R1.1 R4.1 R5.1 R15.1 R16.1 R17.1 R18.1 R19.1 R31.1 R32.1 R33.1 R34.1 R35.1 R38.1 R39.1 R40.1 R41.1 R42.1 R43.1 S1.3 TP2.1 U1.1 U2.1 U3.1 U4.16 U4.21 U5.16 U5.21 | length 10.5
  Top Layer w0.2: R5.1 v1(13.162,13.931) ; U5.21 17.224,34.931 17.224,34.307 U5.16 ; U4.16 32.405,38.204 32.405,37.58 U4.21
  Top Layer w0.5: U1.1 49.017,28.878 49.45,28.446 v1@49.45,24.304
  other v1: 19.177,9.039 19.177,12.539 46.228,14.594 46.228,16.394 8.034,17.107 10.244,17.107 31.698,19.978 31.698,21.678 49.323,24.304 7.509,29.015 38.292,29.347 49.096,29.608 29.871,32.271 13.568,32.711 25.019,32.922 16.336,33.1 10.087,33.161 19.048,33.161 40.616,35.201 25.019,35.526 14.716,36.189 17.219,36.189 32.41,36.322 34.913,36.322 10.087,37.155 30.581,39.35 39.542,39.35 33.293,39.411 36.062,39.8 19.668,39.873
NetC2_1: C2.1 L1.2 U3.2 | length 7.5
  Top Layer w0.254: v1(4.365,15.507) C2.1
  Bottom Layer w0.254: v1(4.365,15.507) v1@4.366,15.508 ; v1@4.366,15.555 v1(8.896,20.085)
NetC2_2: C2.2 U3.6 | length 1.6
  Top Layer w0.254: C2.2 8.016,15.507 8.189,15.68 U3.6
NetC14_2: C14.2 D9.2 F1.1 J1.2 U1.2 | length 1.9
  Top Layer w0.4: D9.2 F1.1@45.085,30.083
NetC16_2: C16.2 D10.2 F3.1 J4.2 U2.2 | length 3.4
  Top Layer w0.254: C16.2 3.723,30.531 3.723,30.693 4.015,30.985 5.416,30.985 D10.2
NetD1_1: D1.1 R1.2 | length 3.3
  Top Layer w0.254: D1.1@14.859,6.312 14.897,6.35 18.028,6.35 R1.2
NetD2_1: D2.1 F2.1 J2.1
  other v1: 24.062,19.228 25.25,19.993 25.198,21.678 24.062,22.428
NetD3_1: D3.1 J1.1 P1.3 U4.8 | length 22
  Top Layer w0.2: U4.8 40.952,36.072 42.3,34.724 J1.1
  Top Layer w0.254: P1.3 37.54,44.928 41.119,41.349 41.119,36.239 40.952,36.072
  Bottom Layer w0.2: P1.3 37.54,47.879 P1.3@37.719,47.7
NetD3_2: D3.2 J1.4 P1.2 U4.7 | length 29.7
  Top Layer w0.2: U4.7 36.745,35.572 37.512,34.804 38.019,34.804 D3.2 38.369,34.554 39.201,33.722 v1(40.719,33.722)
  Top Layer w0.254: P1.2 35,46.08 v1(37.342,43.738)
  Bottom Layer w0.254: v1(37.342,43.738) 40.28,40.801 44.727,40.801 46,39.528 J1.4 43.545,35.597 42.594,35.597 v1(40.719,33.722)
NetD4_1: D4.1 J4.1 P2.3 U5.8 | length 19.5
  Top Layer w0.254: P2.3 12.46,44.341 7.7,39.581 J4.1 7.7,37.145 8.527,36.318 11.151,36.318 D4.1 11.398,36.445 13.57,36.445 U5.8 U5.8@13.331,36.439
NetD4_2: D4.2 J4.4 P2.2 U5.7 | length 24.1
  Top Layer w0.2: J4.4 v1(6.286,35.786)
  Top Layer w0.254: U5.7 12.948,36.939 12.082,37.805 D4.2 11.338,38.506 11.151,38.693 10.642,38.693 10.638,38.689 v1(10.638,38.705) 10.638,41.712 15,46.074 P2.2
  Bottom Layer w0.254: v1(6.286,35.786) 7,36.5 8.433,36.5 v1(10.638,38.705)
NetD5_1: D5.1 R4.2 | length 10.6
  Top Layer w0.254: D5.1 11.811,2.667 12.065,2.413 R4.2
NetD7_1: D7.1 U4.5 | length 2.9
  Top Layer w0.2: U4.5 34.421,34.423 34.421,33.966 34.727,33.66 35.816,33.66 D7.1
NetD7_2: D7.2 R20.1 | length 1.4
  Top Layer w0.254: R20.1@36.432,30.079 D7.2@36.432,31.37
  Top Layer w0.4: R20.1@36.396,30.042 R20.1@36.432,30.079 ; D7.2@36.432,31.37 D7.2
NetD8_1: D8.1 U5.5 | length 2.9
  Top Layer w0.2: D8.1 13.813,38.851 14.902,38.851 15.208,38.545 15.208,38.088 U5.5
NetD8_2: D8.2 R36.1 | length 1.4
  Top Layer w0.2: D8.2 13.233,41.178 R36.1@13.233,42.469
NetD9_1: D9.1 R38.2 | length 2.2
  Top Layer w0.4: R38.2 39.769,30.879 40.566,30.083 D9.1
NetD10_1: D10.1 R39.2 | length 2.6
  Top Layer w0.2: D10.1 8.388,30.36 9.69,29.058 R39.2
NetJ2_5: J2.5 R22.1 R23.2 U5.18 | length 30.4
  Top Layer w0.254: U5.18 20.217,35.939 R23.2@20.743,35.413 ; R22.1 R23.2 21.099,35.083 21.38,35.083 22.76,33.703 22.76,32.104 33.274,21.59 J2.5
NetJ2_6: J2.6 R23.1 R31.2 U5.19 | length 30.5
  Top Layer w0.2: U5.19 20.216,36.439 R23.1@20.743,36.966
  Top Layer w0.254: R31.2 R23.1 22.024,36.966 23.368,35.622 23.368,32.438 34.544,21.262 J2.6
NetJ2_7: J2.7 R6.1 R7.2 U4.18 | length 32.8
  Top Layer w0.2: R7.2@28.886,37.098 29.413,36.572 U4.18
  Top Layer w0.254: R6.1 R7.2 26.821,37.098 26.416,36.693 26.416,31.368 35.814,21.97 J2.7
NetJ2_8: J2.8 R7.1 R15.2 U4.19 | length 28.2
  Top Layer w0.2: R7.1@28.886,35.545 29.413,36.072 U4.19
  Top Layer w0.254: R15.2 R7.1@28.859,35.526 ; R7.1@28.886,35.545 28.867,35.526 R7.1@28.859,35.526 ; J2.8 37.084,21.561 27.178,31.467 27.178,35.116 27.589,35.526 R7.1@28.859,35.526
NetR2_1: R2.1 S1.1 | length 8.7
  Top Layer w0.254: S1.1 4.064,11.938 R2.1
NetR3_1: R3.1 R5.2 U3.4 | length 5.7
  Top Layer w0.254: R3.1 R5.2 10.938,14.031 10.715,14.254 10.615,14.254 10.089,14.78 U3.4
NetR12_2: R12.2 U4.17 | length 8.5
  Top Layer w0.2: v1(26.7,41.251) 27.047,41.598 27.546,41.598 R12.2 ; v1(30.135,38.213) 30.129,38.207 30.129,37.523 30.581,37.072 U4.17
  Bottom Layer w0.2: v1(26.7,41.251) 26.7,40.43 28.031,39.1 29.748,39.1 30.135,38.713 v1(30.135,38.213)
NetR13_2: R13.2 U4.10 | length 1.5
  Top Layer w0.2: U4.10 36.062,37.08 36.508,37.08 36.576,37.149 37.176,37.749 R13.2
NetR14_2: R14.2 U4.3 | length 1.5
  Top Layer w0.2: U4.3 33.421,34.423 33.421,33.818 33.657,33.582 R14.2
NetR21_2: R21.2 U4.4 | length 2
  Top Layer w0.2: U4.4 33.919,34.426 33.919,33.957 34.617,33.258 34.84,33.258 R21.2
NetR28_2: R28.2 U5.17 | length 6.5
  Top Layer w0.2: U5.17 19.048,35.439 19.5,34.988 19.5,34.304 v1(19.494,34.299) ; v1(21.799,31.96) 21.799,31.879 22.049,31.629 R28.2
  Bottom Layer w0.2: v1(19.494,34.299) 19.494,34.282 21.799,31.977 v1(21.799,31.96)
NetR29_2: R29.2 U5.10 | length 1.7
  Top Layer w0.2: R29.2 12.636,34.911 12.636,35.238 12.769,35.37 12.838,35.439 U5.10
NetR30_2: R30.2 U5.3 | length 1.5
  Top Layer w0.2: R30.2 15.972,38.929 16.208,38.693 16.208,38.088 U5.3
NetR37_2: R37.2 U5.4 | length 2.1
  Top Layer w0.2: R37.2@14.639,39.503 R37.2 14.789,39.253 15.012,39.253 15.71,38.554 15.71,38.085 U5.4
NetS1_2: S1.2 U3.5 | length 7.2
  Top Layer w0.254: v1(9.139,14.637) U3.5
  Bottom Layer w0.254: S1.2 6.945,12.319 8.148,12.319 9.139,13.31 v1(9.139,14.637)
SPD1_0: R10.1 R18.2 U4.14 | length 3.4
  Top Layer w0.2: U4.14 33.421,38.221 33.421,38.608 34.087,39.273 34.087,39.55 R18.2 R10.1
SPD1_1: R26.1 R34.2 U5.14 | length 3.4
  Top Layer w0.2: R26.1 R34.2 15.543,32.961 15.543,33.238 16.208,33.903 16.208,34.29 U5.14
SPD2_0: R11.1 R19.2 U4.15 | length 3.8
  Top Layer w0.2: R11.1 R19.2 31.918,39.567 31.918,39.208 32.206,38.92 32.66,38.92 32.905,38.675 32.905,38.221 U4.15
SPD2_1: R27.1 R35.2 U5.15 | length 3.6
  Top Layer w0.2: 16.843,33.637 17.019,33.461 17.167,33.461 17.955,32.673 R27.1
  Top Layer w0.254: U5.15 16.722,34.293 16.722,33.758 16.843,33.637
pads on no net: J1.5 J1.6 J2.3 J2.4 J4.5 J4.6 U4.6 U4.9 U4.13 U4.20 U5.6 U5.9 U5.13 U5.20

## Polygon pours and split planes (outlines as drawn)
GND on Top Layer "GNDTOP" (solid, pour order 64): 2,0 cw(c2,2) 0,2 0,48 cw(c2,48) 2,50 48,50 cw(c48,48) 50,48 50,2 cw(c48,2) 48,0
NetD2_1 on Top Layer "NETD2_1_L01_P048" (solid, pour order 48): 26.965,12.636 29.046,12.636 29.464,13.054 29.464,16.129 27.698,17.895 27.698,22.388 27.226,22.86 22.86,22.86 22.562,22.562 22.562,17.039
CHASSIS on Top Layer "CHASSIS_L01_P062" (solid, pour order 62): 10.121,44.288 9.121,44.288 8.571,43.738 8.571,42.738 7.333,41.5 5,41.5 5,48.5 7.777,48.5 9.143,47.135 10.499,47.135 10.499,44.666
CHASSIS on Top Layer "CHASSIS_L01_P061" (solid, pour order 61): 39.879,44.288 40.879,44.288 41.429,43.738 41.429,42.738 42.667,41.5 45,41.5 45,48.5 42.223,48.5 40.857,47.135 39.501,47.135 39.501,44.666
CHASSIS on Top Layer "CHASSIS_L01_P060" (solid, pour order 60): 44.288,10.121 44.288,9.121 43.738,8.571 42.738,8.571 41.5,7.333 41.5,5 48.5,5 48.5,7.777 47.135,9.143 47.135,10.499 44.666,10.499
CHASSIS on Top Layer "CHASSIS_L01_P058" (solid, pour order 58): 10.121,5.712 9.121,5.712 8.571,6.262 8.571,7.262 7.333,8.5 5,8.5 5,1.5 7.777,1.5 9.143,2.865 10.499,2.865 10.499,5.334
NetC14_2 on Top Layer "Fused_IN_1" (solid, pour order 49): 45.415,28.503 44.335,29.583 44.335,30.598 45.085,31.352 45.085,35.56 45.552,36.028 47.535,36.031 49.264,34.302 49.264,31.23 47.846,29.812 47.846,28.503
+5V06 on Top Layer "+5V06_L01_P051" (solid, remove dead copper, pour order 51): 49.76,25.425 49.32,24.986 48.157,24.986 47.488,25.654 35.496,25.654 35.248,25.902 35.248,28.067 35.537,28.356 49.76,28.356
+5V06 on Top Layer "+5V06_L01_P057" (solid, pour order 57): 16.573,38.917 16.74,39.084 16.74,40.569 16.73,40.579 16.73,42.672 17.781,42.672 17.781,38.172 17.252,37.643 16.727,37.643 16.573,37.797
+5V06 on Top Layer "+5V06_L01_P056" (solid, pour order 56): 33.056,33.595 32.889,33.427 32.889,31.943 32.899,31.932 32.899,27.599 32.732,27.432 32.004,27.432 31.848,27.588 31.848,34.339 32.377,34.868 32.902,34.868 33.056,34.714
+12V0 on Top Layer "Top Layer-+12V0" (solid, pour order 55): 9.703,18.116 9.912,17.907 10.538,17.907 11.188,17.257 15.312,17.257 17.93,14.639 19.977,14.639 20.162,14.824 20.162,22.098 19.712,22.548 17.93,22.548 17.93,19.93 17.107,19.107 14.919,19.107 9.703,19.107
+5V06 on Top Layer "+5V06_L01_P054" (solid, pour order 54): 7.188,17.844 7.188,18.794 5.953,20.03 5.953,23.913 4.103,23.913 4.103,20.115 2.835,18.847 2.835,18.195 3.185,17.844
NetC2_1 on Top Layer "NETC2_1_L01_P045" (solid, pour order 45): 9.603,19.813 9.439,19.649 9.439,17.907 8.839,17.907 8.839,18.837 7.863,19.813 7.753,19.813 7.753,23.913 9.603,23.913
GND on Top Layer "GND_L01_P046" (solid, pour order 46): 6.853,17.407 6.978,17.532 7.564,17.532 7.889,17.857 7.889,18.457 8.489,18.457 8.489,17.958 8.84,17.607 10.321,17.607 11.037,16.891 15.413,16.891 15.413,16.002 10.274,16.002 7.226,16.002 3.277,16.002 2.781,16.498 2.781,17.407
+5V06 on Top Layer "Top Layer-+5V12" (solid, pour order 53): 5.878,23.229 4.103,23.229 0.647,26.685 0.647,28.356 22.698,28.356 22.975,28.079 22.975,25.959 21.528,24.513 7.162,24.513
NetC16_2 on Top Layer "Fused_IN_2" (solid, pour order 50): 1.675,29.683 2.8,28.558 3.4,28.558 3.85,29.008 3.85,30.658 3.103,31.405 3.103,32.709 3.103,34.103 4.915,35.915 4.915,37.475 4.911,37.479 2.465,37.479 0.647,35.778 0.647,29.683
GND on Bottom Layer "GND_MAIN" (solid, pour order 65): 2,0 cw(c2,2) 0,2 0,48 cw(c2,48) 2,50 48,50 cw(c48,48) 50,48 50,2 cw(c48,2) 48,0
CHASSIS on Bottom Layer "CHASSIS_L02_P059" (solid, pour order 59): 45,5 45,45 5,45 5,0 1.942,0 cw(c2.009,2.019) 0,1.812 0,48.243 cw(c2.05,47.95) 1.757,50 48,50 cw(c48,48) 50,48 50,1.564 cw(c47.757,2.243) 48.436,0 45,0
+5V06 on Bottom Layer "Bottom Layer-+5V06" (solid, pour order 52): 20.066,26.035 20.447,25.654 37.719,25.654 38.1,26.035 38.1,28.067 37.811,28.356 24.857,28.356 24.386,28.827 24.386,42.386 23.681,43.091 17.038,43.091 16.727,42.78 16.727,41.546 17.054,41.219 21.952,41.219 22.602,40.568 22.602,28.906 22.053,28.356 20.066,28.356

## Silkscreen, mask and mechanical layers (free items; w line width, h text height)
Top Overlay:
  lines w0.2: 15.777,10.189 17.777,10.189 ; 20.577,10.189 22.577,10.189
  text "GND" at 30.226,45.355 h1.5
  text "SCL" at 33.47,45.355 h1.5
  text "SDA" at 36.411,45.355 h1.5
  text "SDA" at 11.049,45.228 h1.5
  text "SCL" at 14.42,45.228 h1.5
  text "GND" at 17.294,45.228 h1.5
  text "5V0" at 45.191,19.177 h2 r90
  text "GND" at 45.318,13.589 h2 r90
  text "5V0" at 12.425,1.651 h2 r90
  text "12V0" at 15.438,1.016 h2 r90
Board:
  lines w0.1: 25.006,0 2,0 cw(c2,2) 0,2 0,48 cw(c2,48) 2,50 48,50 cw(c48,48) 50,48 50,2 cw(c48,2) 48,0 40.272,0

## Text inside footprints (layer, text, board x,y; h text height)
C1: Top Overlay "+" at 22.226,17.625 h1.2 r90